# Altium PCB Nextion bridge.PcbDoc
Units mm, origin at the board's own origin, x right, y up, seen from the top; angles counter-clockwise.
Board outline 90 x 30 mm, 2 copper layers (Top Layer, Bottom Layer); 11 components, 15 nets, 83 pads, 29 vias.
Unrouted connection lines stored in the file: 1.
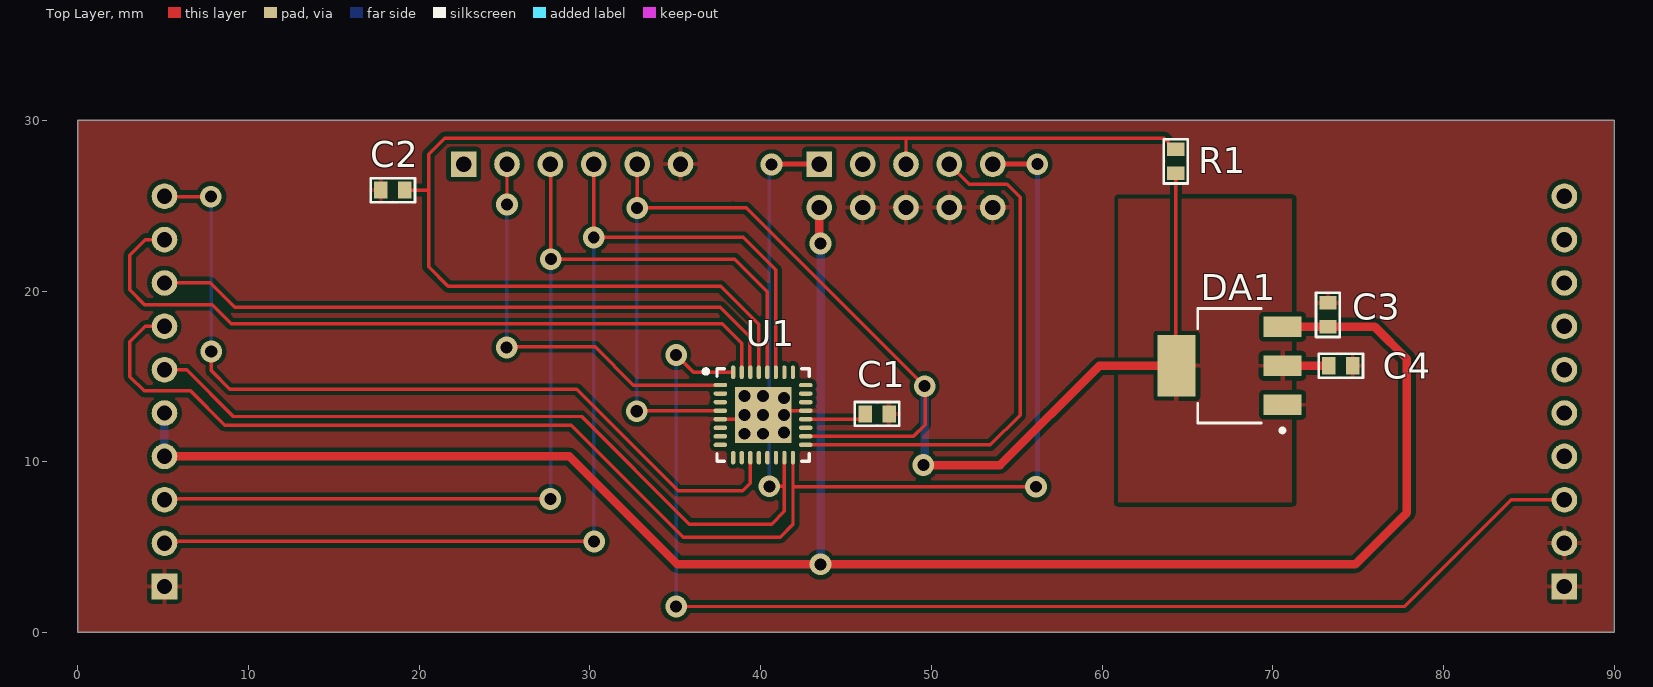
[diagram p0: Top Layer view]
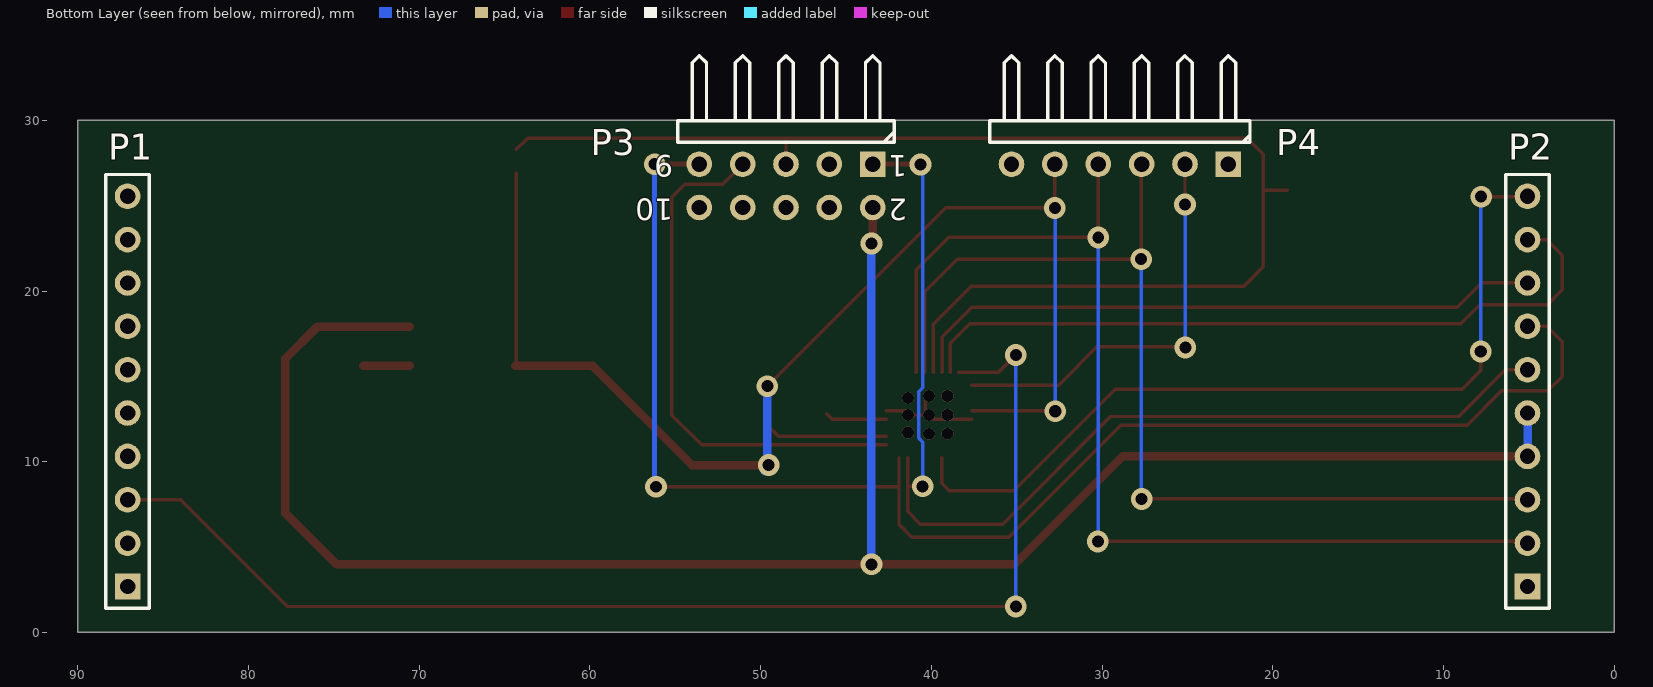
[diagram p1: Bottom Layer view, seen from below]
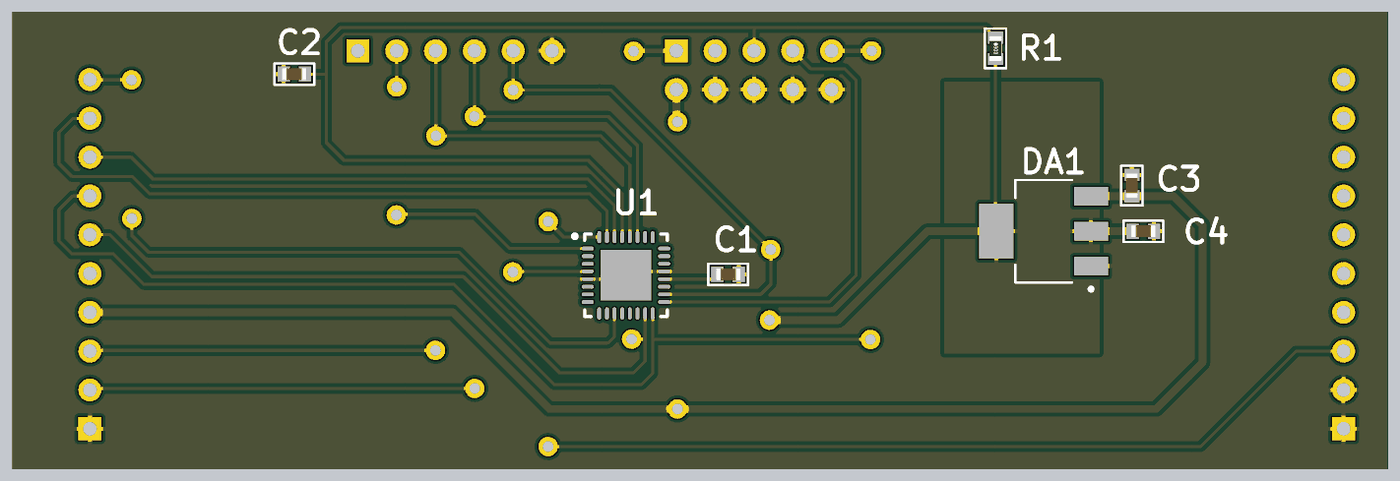
[diagram p2: 3D render of the assembled board from above, using the file's embedded part models]

## Layer stack, top to bottom
Top Solder: solder mask 0.0102, Solder Resist, Dk 3.5
Top Layer: signal copper 0.0356
Dielectric 1: dielectric 0.32, FR-4, Dk 4.8
Bottom Layer: signal copper 0.0356
Bottom Solder: solder mask 0.0102, Solder Resist, Dk 3.5

## Board outline
0,0 90,0 90,30 0,30

## Design rules (kind name [scope] priority, off if disabled: settings)
Clearance [All] p1: gap=0.254 ignorepadtopadclearanceinfootprint=FALSE except(0: Arc-Hole Track-Hole SMDPad-Hole THPad-Hole Via-Hole Fill-Hole Poly-Hole Region-Hole Text-Hole)
PolygonConnect [All] p1: connectstyle=Relief reliefconductorwidth=0.254 reliefentries=4 polygonreliefangle="90 Angle" airgapwidth=0.254
RoomDefinition "Nextion bridge" [InComponentClass('Nextion bridge')] p1: confinementstyle=ConfineOut formatcopy=TRUE lockcomponents=FALSE outline 0,-30.734 90.17,-30.734 90.17,-1.016 0,-1.016
RoutingVias [All] p1: holewidth=0.711 width=1.27 viastyle="Through Hole" minholewidth=0.711 minwidth=1.27 maxholewidth=0.711 maxwidth=1.27
SolderMaskExpansion [All] p1: expansion=0.102
Width [All] p1: maxlimit=0.5 minlimit=0.2 preferedwidth=0.3
30 further rules are at their usual default settings.

## Components (designator, comment, footprint, x,y, rotation, side; value= is the part's Value field where it differs from the comment)
C1 "C_0603" SM/C_0603 46.123,12.802 r0 top
C2 "C_0603" SM/C_0603 19.155,25.908 r180 top
C3 "C_0603" SM/C_0603 73.228,17.907 r90 top
C4 "C_0603" SM/C_0603 73.279,15.621 r0 top
DA1 "IRU1117" SOT223 70.561,13.335 r90 top
P1 "Header 10" HDR1X10 87.08,2.692 r90 bottom
P2 "Header 10" HDR1X10 5.08,2.692 r90 bottom
P3 "Header 5X2H" HDR2X5H 43.434,27.432 r0 bottom
P4 "Header 6H" HDR1X6H 22.606,27.432 r0 bottom
R1 "R_0603" SM/R_0603 64.313,28.296 r270 top
U1 "ATmega328P-MN" 32M1-A_N 40.144,12.74 r0 top

## Footprints (in the part's own frame and the unit in brackets; to place one, negate y for a bottom-side part, rotate by r counter-clockwise, add the part's x,y. Pads: shape width x height; smd on the part's side, far side on the other; paste and mask are expansions set on the pad)
32M1-A_N [mm] "QFN, 32-Leads, Body 5x5mm, Pitch 0.5mm, Thermal Pad 3.3x3.3mm, IPC Medium Density"
  oval 0.8x0.25 smd: 1(-2.5,1.75) 2(-2.5,1.25) 3(-2.5,0.75) 4(-2.5,0.25) 5(-2.5,-0.25) 6(-2.5,-0.75) 7(-2.5,-1.25) 8(-2.5,-1.75) 17(2.5,-1.75) 18(2.5,-1.25) 19(2.5,-0.75) 20(2.5,-0.25) 21(2.5,0.25) 22(2.5,0.75) 23(2.5,1.25) 24(2.5,1.75)
  oval 0.25x0.8 smd: 9(-1.75,-2.5) 10(-1.25,-2.5) 11(-0.75,-2.5) 12(-0.25,-2.5) 13(0.25,-2.5) 14(0.75,-2.5) 15(1.25,-2.5) 16(1.75,-2.5) 25(1.75,2.5) 26(1.25,2.5) 27(0.75,2.5) 28(0.25,2.5) 29(-0.25,2.5) 30(-0.75,2.5) 31(-1.25,2.5) 32(-1.75,2.5)
  rect 3.3x3.3 smd: 33(0,0)
  silkscreen extent -3.47,-2.7 2.7,2.7, body extent -2.55,-2.55 2.55,2.55, height 1
HDR1X6H [mm] "Connector; Header; 6 Position; Right Angle"
  rect 1.5x1.5 hole 0.9: 1(0,0)
  round 1.5 hole 0.9: 2(2.54,0) 3(5.08,0) 4(7.62,0) 5(10.16,0) 6(12.7,0)
  silkscreen extent -1.27,-6.35 13.97,-1.27
HDR1X10 [mm] "Connector; Header; 10 Position"
  rect 1.5x1.5 hole 0.9: 1(0,0)
  round 1.5 hole 0.9: 2(2.54,0) 3(5.08,0) 4(7.62,0) 5(10.16,0) 6(12.7,0) 7(15.24,0) 8(17.78,0) 9(20.32,0) 10(22.86,0)
  silkscreen extent -1.27,-1.27 24.13,1.27
HDR2X5H [mm] "Connector; Header; 5x2 Position; Right Angle"
  rect 1.5x1.5 hole 0.9: 1(0,0)
  round 1.5 hole 0.9: 2(0,2.54) 3(2.54,0) 4(2.54,2.54) 5(5.08,0) 6(5.08,2.54) 7(7.62,0) 8(7.62,2.54) 9(10.16,0) 10(10.16,2.54)
  silkscreen extent -1.27,-6.35 11.43,-1.27
SM/C_0603 [mm]
  rect 0.8x1 smd: 1(0,0) 2(1.4,0)
  silkscreen extent -0.6,-0.7 2,0.7, body extent -0.09,-0.4 1.51,0.4, height 0.6
SM/R_0603 [mm]
  rect 0.8x1 smd: 1(0,0) 2(1.4,0)
  silkscreen extent -0.6,-0.7 2,0.7, body extent -0.09,-0.41 1.51,0.41, height 0.45
SOT223 [mil]
  rect 48x88 smd: 1(0,0) 2(90,0) 3(180,0)
  rect 142x88 smd: 4(90,244)
  silkscreen extent -63,-4 222,195

## Part data
C1 C2 C3 C4: Manufacturer=AVX, Package=0603, Tolerance=±20%, Voltage=50V, TCC=±15%, Type=X7R
DA1: Package=SOT-223, Òèï=IRU1117-18CY
P1 P2: "Header, 10-Pin", LatestRevisionDate=17-Jul-2002, LatestRevisionNote="Re-released for DXP Platform.", Publisher="Altium Limited"
P3: "Header, 5-Pin, Dual row, Right Angle", LatestRevisionDate=17-Jul-2002, LatestRevisionNote="Re-released for DXP Platform.", Publisher="Altium Limited"
P4: "Header, 6-Pin, Right Angle", LatestRevisionDate=17-Jul-2002, LatestRevisionNote="Re-released for DXP Platform.", Publisher="Altium Limited"
R1: Manufacturer=YAGEO, Package=0603, Power=1/10W, Tolerance=±5%, TCR=±100ppm/°C, Type=RC
U1: "8-bit AVR Microcontroller, 32KB Flash, 1KB EEPROM, 2KB SRAM, 32-pin MLF, Industrial Grade (-40°C to 105°C)", Code_JEDEC=MO-220-VHHD-2, ComponentLink1Description="Manufacturer URL", ComponentLink1URL=http://www.atmel.com/, ComponentLink2Description="ATmega48A/48PA/88A/88PA/168A/168PA/328/328P Datasheet", ComponentLink2URL=http://www.atmel.com/dyn/resources/prod_documents/8271.pdf, ComponentLink3Description="ATmega48A/48PA/88A/88PA/168A/168PA/328/328P Summary", ComponentLink3URL=http://www.atmel.com/dyn/resources/prod_documents/8271S.pdf, DatasheetVersion="revD, May-2011", PackageDescription="32-Pin Micro Lead Frame Package (MLF),  5 x 5 x 1.0 mm Body, Pitch 0.50 mm, 3.10mm Exposed Pad", PackageReference=32M1-A, PackageVersion="revE, May-2006"

## Via types
v1: diameter 1.27, hole 0.711, Top Layer to Bottom Layer, 12 vias
v2: diameter 0.7, hole 0.7, Top Layer to Bottom Layer, 9 vias
v3: diameter 1.27, hole 0.7, Top Layer to Bottom Layer, 8 vias

## Nets (pads, with @x,y where several pads share a name; then routed paths per layer and width w, separated by ;. In a path a pad name is that pad's centre, name@x,y a point inside that pad or via, vN(x,y) a via of type N, cw(c..) or ccw(c..) an arc to the next point about the centre after c; other vN are vias at no path point)
BUT_P/S: P1.3 U1.32 | length 73.1
  Top Layer w0.2: v1(35.052,1.524) 77.724,1.524 83.972,7.772 P1.3 ; v1(35.052,16.256) 36.068,15.24 U1.32
  Bottom Layer w0.2: v1(35.052,1.524) v1(35.052,16.256)
GND: C1.2 C2.2 C3.2 C4.2 DA1.1 P1.1 P1.2 P2.1 P3.4 P3.6 P3.8 P3.10 P4.6 U1.5 U1.21 U1.33 | length 6
  Top Layer w0.2: U1.5 39.894,12.49 v2(40.144,12.74) U1.33@40.37,12.74 ; U1.33@40.37,13.614 U1.33@40.37,12.74 ; U1.33@41.362,12.74 U1.33@40.37,12.74 ; U1.33@41.374,12.99 U1.21
  other v2: 39.044,11.64 40.144,11.64 41.374,11.712 41.374,12.728 39.044,12.74 41.374,13.744 39.044,13.84 40.144,13.84
I2C_CLK: P2.3 P4.3 U1.28 | length 60.4
  Top Layer w0.2: P2.3 5.131,7.823 v3(27.686,7.823) ; P4.3 27.711,27.407 v3(27.711,21.869) 38.481,21.869 40.394,19.956 U1.28
  Bottom Layer w0.2: v3(27.686,7.823) 27.711,7.849 v3(27.711,21.869)
I2C_SDA: P2.2 P4.4 U1.27 | length 64.9
  Top Layer w0.2: P2.2 5.182,5.334 v3(30.251,5.334) ; P4.4 v3(30.226,23.139) 38.989,23.139 40.894,21.234 U1.27
  Bottom Layer w0.2: v3(30.226,23.139) 30.226,5.283 30.251,5.309 v3(30.251,5.334)
NetC1_1: C1.1 U1.20 | length 3.6
  Top Layer w0.2: U1.20 45.812,12.49 C1.1
nRESET: C2.1 P3.5 R1.1 U1.29 | length 77.5
  Top Layer w0.2: C2.1 20.549,25.908 ; U1.29 39.894,18.043 37.668,20.269 21.689,20.269 20.549,21.41 20.549,25.908 ; P3.5 48.514,28.956 ; R1.1 63.652,28.956 48.514,28.956 ; 20.549,25.908 20.549,28.016 21.488,28.956 48.514,28.956
RxD_0: P2.8 U1.30 | length 37.7
  Top Layer w0.2: P2.8 7.772,20.472 9.195,19.05 37.643,19.05 39.373,17.32 39.373,15.261 U1.30
RxD_1: P2.7 P3.9 U1.16 | length 87.2
  Top Layer w0.2: P2.7 3.962,17.932 3.048,17.018 3.048,14.986 3.886,14.148 6.604,14.148 8.611,12.141 28.905,12.141 35.458,5.588 41.148,5.588 41.894,6.334 41.894,8.534 ; U1.16 41.894,8.534 ; v3(56.134,8.534) 41.894,8.534 ; v3@56.159,27.432 v3(56.21,27.432)
  Top Layer w0.3: P3.9 v3@56.159,27.432
  Bottom Layer w0.3: v3(56.134,8.534) 56.134,8.56 56.21,8.636 v3(56.21,27.432)
SCK0: P3.7 U1.17 | length 31
  Top Layer w0.2: U1.17 53.459,10.99 55.194,12.725 55.194,25.502 54.432,26.264 52.222,26.264 P3.7
SQW: P4.2 U1.1 | length 24.9
  Top Layer w0.2: v1(25.121,16.688) 25.121,17.145 25.197,17.221 25.683,16.735 30.305,16.735 32.551,14.49 U1.1 ; v1(25.146,25.07) P4.2
  Bottom Layer w0.2: v1(25.121,16.688) 25.121,24.943 25.197,25.019 v1(25.146,25.07)
TxD_0: P2.9 U1.31 | length 43.3
  Top Layer w0.2: P2.9 3.962,23.012 3.048,22.098 3.048,20.066 3.912,19.202 7.874,19.202 8.992,18.085 37.744,18.085 38.894,16.935 U1.31
TxD_1: P2.6 P3.1 U1.15 | length 66.3
  Top Layer w0.2: P2.6 6.375,15.392 9.119,12.649 29.515,12.649 35.814,6.35 40.64,6.35 41.394,7.104 41.394,8.56 ; v3(40.513,8.56) 41.394,8.56 ; U1.15 41.394,8.56
  Top Layer w0.3: v3(40.64,27.407) 40.665,27.432 P3.1
  Bottom Layer w0.2: v3(40.513,8.56) 40.513,11.155 40.748,11.39 40.748,14.09 40.513,14.325 v3@40.513,27.28
  Bottom Layer w0.3: v3@40.513,27.28 v3(40.64,27.407)
VCC: C4.1 DA1.2 DA1.4 P4.5 R1.2 U1.4 U1.18 | length 86.5
  Top Layer w0.2: v1(32.741,12.954) 32.777,12.99 U1.4 ; P4.5 v1(32.766,24.867) 38.405,24.867 ; 38.379,24.892 38.405,24.867 ; U1.18 48.955,11.49 49.632,12.167 v1@49.632,14.453 ; v1(49.606,14.427) 39.167,24.867 38.405,24.867 ; R1.2 64.313,15.672 DA1.4
  Top Layer w0.5: v1(49.53,9.804) 54.026,9.804 59.842,15.621 DA1.4 ; DA1.2 C4.1
  Bottom Layer w0.2: v1(32.741,12.954) 32.741,24.841 v1(32.766,24.867)
  Bottom Layer w0.5: v1(49.606,14.427) 49.606,9.881 v1(49.53,9.804) 49.53,9.677 v1@49.759,9.449
Vcc_CTRL: P2.10 U1.11 | length 49.2
  Top Layer w0.2: P2.10 5.105,25.527 v1(7.798,25.527) ; v1(7.823,16.459) 7.823,15.316 7.836,15.329 8.915,14.249 29.235,14.249 35.179,8.306 38.964,8.306 39.394,8.736 U1.11
  Bottom Layer w0.2: v1(7.798,25.527) 7.747,25.476 7.823,25.4 v1(7.823,16.459)
Vcc_USB: C3.1 DA1.3 P2.4 P2.5 P3.2 | length 117.2
  Top Layer w0.5: P2.4 28.804,10.312 35.128,3.988 v1(43.51,3.988) 74.828,3.988 77.851,7.01 77.851,16.027 75.971,17.907 C3.1 DA1.3 ; P3.2 43.434,22.86 v1(43.51,22.784)
  Bottom Layer w0.5: P2.4 P2.5 ; v1(43.51,3.988) v1(43.51,22.784)
pads on no net: P1.4 P1.5 P1.6 P1.7 P1.8 P1.9 P1.10 P3.3 P4.1 U1.2 U1.3 U1.6 U1.7 U1.8 U1.9 U1.10 U1.12 U1.13 U1.14 U1.19 U1.22 U1.23 U1.24 U1.25 U1.26

## Polygon pours and split planes (outlines as drawn)
GND on Top Layer "GND" (solid, pour order 6): 89.916,29.972 89.916,0 0,0 0,29.972
VCC on Top Layer "Vcc" (solid, pour order 4): 71.12,7.62 60.96,7.62 60.96,25.4 71.12,25.4

## Silkscreen, mask and mechanical layers (free items; w line width, h text height)
Mechanical 1:
  the board outline again, w0.254

## Dimensions
5.08,2.692 to 87.08,2.692 on Mechanical 1

## Text inside footprints (layer, text, board x,y; h text height)
P3: Bottom Overlay "10" at 55.118,25.4 h1.27 r180; Bottom Overlay "9" at 55.118,27.94 h1.27 r180; Bottom Overlay "1" at 41.402,27.94 h1.27 r180; Bottom Overlay "2" at 41.402,25.4 h1.27 r180